# Altium PCB NODE_2_PCB.PcbDoc
Units mm, origin at the board's own origin, x right, y up, seen from the top; angles counter-clockwise.
Board outline 130 x 135 mm, 2 copper layers (Top Layer, Bottom Layer); 55 components, 51 nets, 273 pads, 0 vias.
Unrouted connection lines stored in the file: 153.
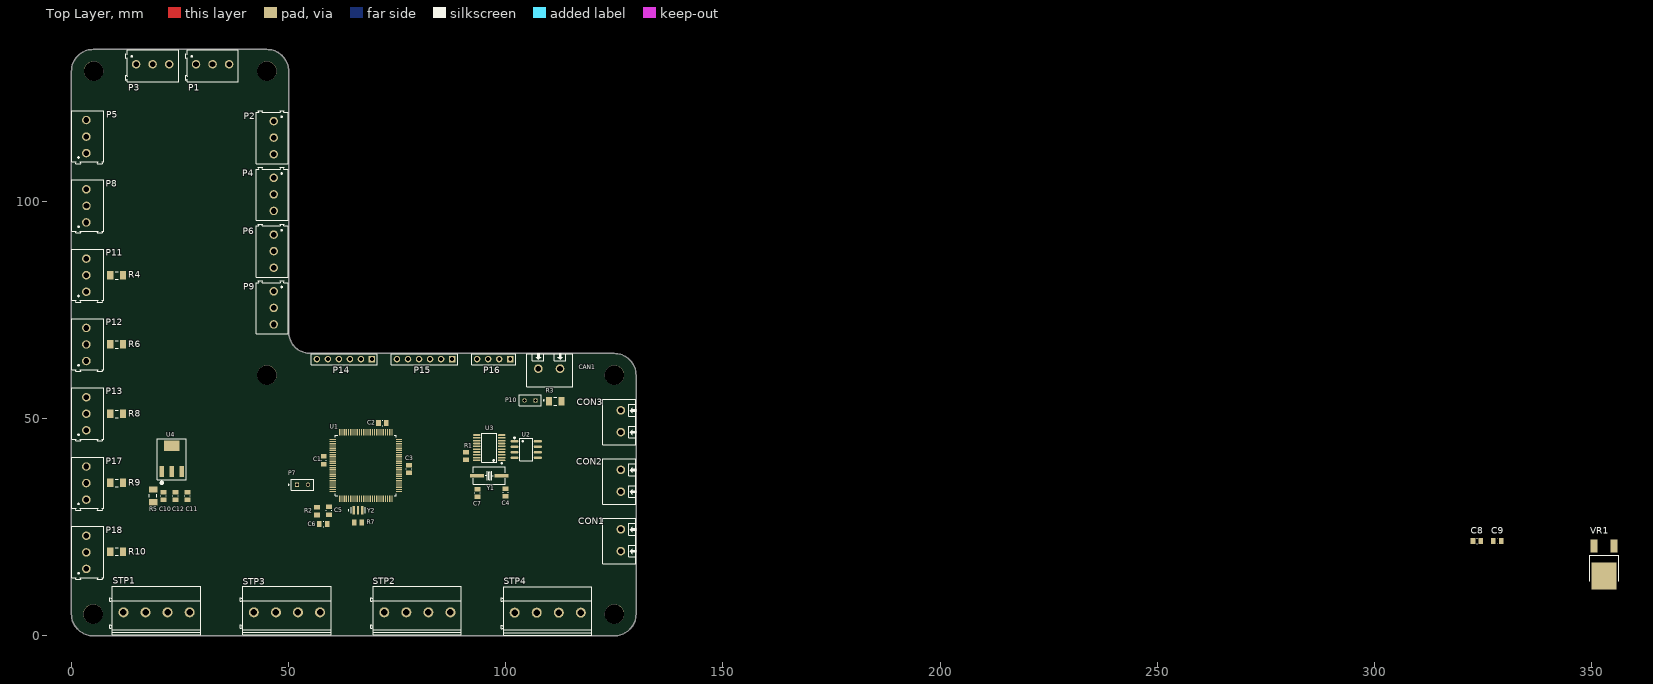
[diagram p0: Top Layer view]
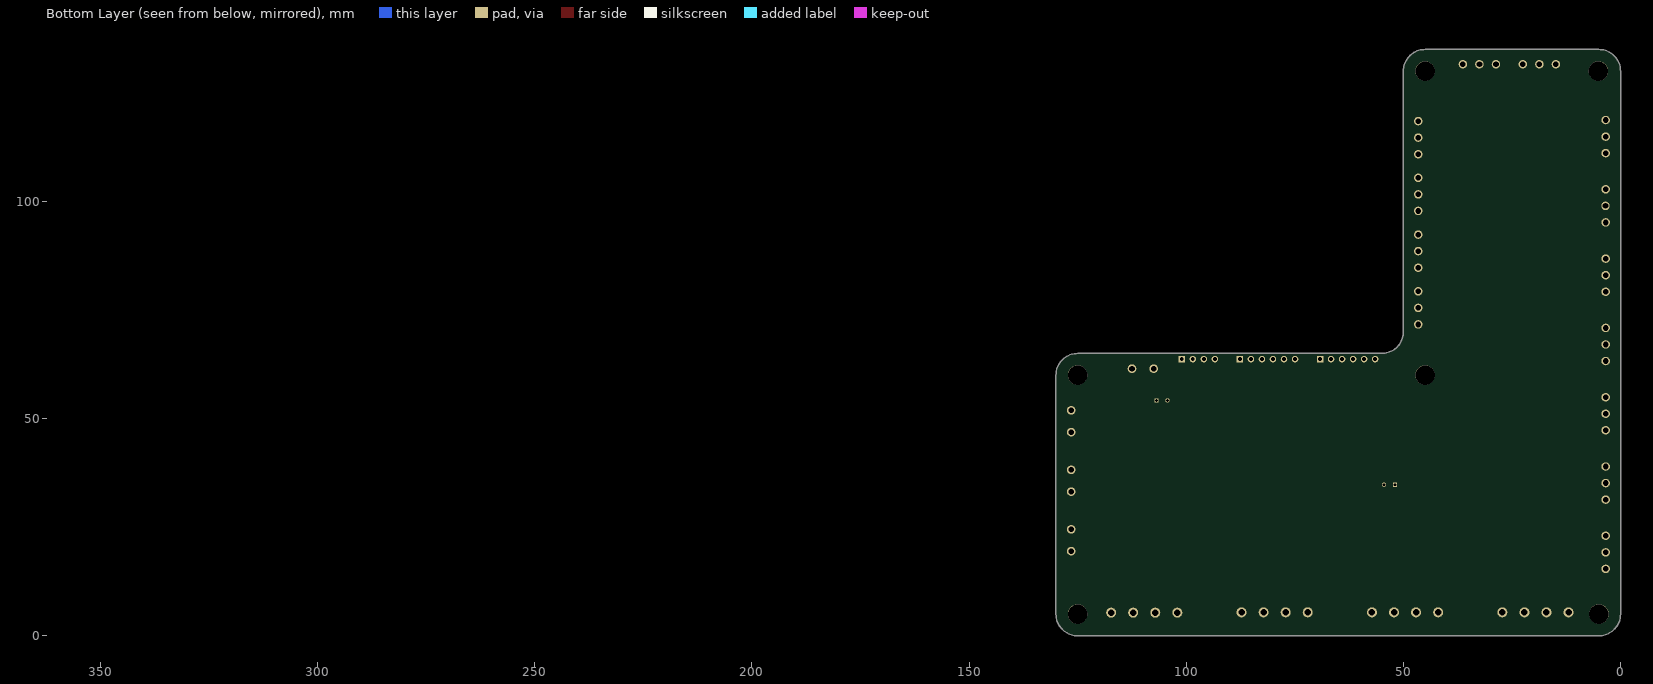
[diagram p1: Bottom Layer view, seen from below]

## Layer stack, top to bottom
Top Solder: solder mask 0.0102, Solder Resist, Dk 3.5
Top Layer: signal copper 0.0356
Dielectric 1: dielectric 0.32, FR-4, Dk 4.8
Bottom Layer: signal copper 0.0356
Bottom Solder: solder mask 0.0102, Solder Resist, Dk 3.5

## Board outline
0.006,5.006 0.006,130.006 cw(c5.006,130.006) 5.006,135.006 45.006,135.006 cw(c45.006,130.006) 50.006,130.006 50.006,70.006 ccw(c55.006,70.006) 55.006,65.006 125.006,65.006 cw(c125.006,60.006) 130.006,60.006 130.006,5.006 cw(c125.006,5.006) 125.006,0.006 5.006,0.006 cw(c5.006,5.006)

## Design rules (kind name [scope] priority, off if disabled: settings)
Clearance [All] p1: gap=0.254 ignorepadtopadclearanceinfootprint=FALSE except(0: Arc-Hole Track-Hole SMDPad-Hole THPad-Hole Via-Hole Fill-Hole Poly-Hole Region-Hole Text-Hole)
PolygonConnect [All] p1: connectstyle=Relief reliefconductorwidth=0.254 reliefentries=4 polygonreliefangle="90 Angle" airgapwidth=0.254
RoutingVias [All] p1: holewidth=0.711 width=1.27 viastyle="Through Hole" minholewidth=0.711 minwidth=1.27 maxholewidth=0.711 maxwidth=1.27
SolderMaskExpansion [All] p1: expansion=0.102 istentingtop=FALSE
Width [All] p1: maxlimit=0.254 minlimit=0.254 preferedwidth=0.254
30 further rules are at their usual default settings.

## Components (designator, comment, footprint, x,y, rotation, side; value= is the part's Value field where it differs from the comment)
C1 "Cap" CAPC2012X135N 58.1,40.4 r270 top value=100nF
C2 "Cap" CAPC2012X135N 71.6,49 r180 top value=100nF
C3 "Cap" CAPC2012X135N 77.7,38.4 r90 top value=100nF
C4 "Cap" CAPC2012X135N 100,33 r90 top value=30pF
C5 "Cap" CAPC2012X135N 59.3,28.8 r270 top value=22pF
C6 "Cap" CAPC2012X135N 58,25.7 r0 top value=100nF
C7 "Cap" CAPC2012X135N 93.5,32.89 r270 top value=30pF
C8 "Cap" CAPC2012X135N 323.599,21.8 r0 top value=10uF
C9 "Cap" CAPC2012X135N 328.299,21.8 r0 top value=10uF
C10 "Cap" CAPC2012X135N 21.243,32.2 r90 top value=100nF
C11 "Cap" CAPC2012X135N 26.7,32.2 r90 top value=10uF
C12 "Cap" CAPC2012X135N 23.972,32.2 r90 top value=100nF
CAN1 "CAN_PORT" 12V_CON 112.5,61.5 r180 top
CON1 "5V_SUPPLY" 12V_CON 126.5,19.5 r90 top
CON2 "12V_PORT" 12V_CON 126.5,33.2 r90 top
CON3 "36VDC" 12V_CON 126.5,46.9 r90 top
P1 "Header 3" 3PIN_H#1 32.5,131.6 r0 top
P2 "Header 3" 3PIN_H#1 46.6,114.7 r270 top
P3 "Header 3" 3PIN_H#1 18.7,131.6 r0 top
P4 "Header 3" 3PIN_H#1 46.6,101.633 r270 top
P5 "Header 3" 3PIN_H#1 3.438,114.941 r90 top
P6 "Header 3" 3PIN_H#1 46.6,88.567 r270 top
P7 "Header 2" SAMTEC_TS-102-G-A 53.2,34.8 r0 top
P8 "Header 3" 3PIN_H#2 3.438,98.986 r90 top
P9 "Header 3" 3PIN_H#1 46.6,75.5 r270 top
P10 "Header 2" SAMTEC_TS-102-G-A 105.6,54.2 r180 top
P11 "Header 3" 3PIN_H#1 3.438,83.031 r90 top
P12 "Header 3" 3PIN_H#1 3.438,67.075 r90 top
P13 "Header 3" 3PIN_H#1 3.438,51.12 r90 top
P14 "Header 6" HDR1X6 69.2,63.7 r180 top
P15 "Header 6" HDR1X6 87.66,63.7 r180 top
P16 "Header 4" HDR1X4 101.04,63.7 r180 top
P17 "Header 3" 3PIN_H#1 3.438,35.165 r90 top
P18 "Header 3" 3PIN_H#1 3.438,19.21 r90 top
R1 "Res2" RESC2013X06N 90.9,41.4 r270 top value=10K
R2 "Res2" RESC2013X06N 56.5,28.7 r270 top value=1K
R3 "Res2" CRCW1206120RFKEAHP 111.4,54 r0 top value=120
R4 "Res2" CRCW1206120RFKEAHP 10.4,83 r0 top value=480K
R5 "Res2" CRCW1206120RFKEAHP 18.8,32.2 r90 top value=480K
R6 "Res2" CRCW1206120RFKEAHP 10.4,67.1 r0 top value=480K
R7 "Res1" RESC2013X06N 66,26.1 r0 top value=1M
R8 "Res2" CRCW1206120RFKEAHP 10.4,51.1 r0 top value=480K
R9 "Res2" CRCW1206120RFKEAHP 10.4,35.2 r0 top value=480K
R10 "Res2" CRCW1206120RFKEAHP 10.4,19.4 r0 top value=480K
STP1 "STPR_MTR_PORT" "CONN-TH_4P-P5.08_DIBO_DB128V-5.08 - duplicate1" 19.6,5.4 r0 top
STP2 "STPR_MTR_PORT" "CONN-TH_4P-P5.08_DIBO_DB128V-5.08 - duplicate1" 79.653,5.4 r0 top
STP3 "STPR_MTR_PORT" "CONN-TH_4P-P5.08_DIBO_DB128V-5.08 - duplicate1" 49.627,5.4 r0 top
STP4 "STPR_MTR_PORT" "CONN-TH_4P-P5.08_DIBO_DB128V-5.08 - duplicate1" 109.68,5.334 r0 top
U1 "ATMEGA2560-16AU" QFP50P1600X1600X120-100N 67.8,39.2 r0 top
U2 "TJA1050DRG" "SOP-8_L4.9-W3.9-P1.27-LS6.0-BL - duplicate" 104.7,42.9 r270 top
U3 "MCP2515T-I/ST" TSSOP-20_L6.5-W4.4-P0.65-LS6.4-BL 96.2,43.3 r90 top
U4 "36-8V" SOT-223-3_L6.5-W3.4-P2.30-LS7.0-BR 23.1,40.8 r270 top
VR1 "5-3.3V" TO-252-2_L6.6-W6.1-P4.57-LS9.9-BR-CW 352.899,17.2 r90 top
Y1 "XTAL" CRYSTAL-SMD_L7.4-W4.0-LS8.0 96.2,36.9 r0 top value=8MHz
Y2 "CSTCE16M0V53-R0" OSC_CSTCE16M0V53-R0 66,28.9 r0 top value=16MHz

## Footprints (in the part's own frame and the unit in brackets; to place one, negate y for a bottom-side part, rotate by r counter-clockwise, add the part's x,y. Pads: shape width x height; smd on the part's side, far side on the other; paste and mask are expansions set on the pad)
3PIN_H#1 [mm]
  round 1.95 hole 1.3: 1(-3.81,0) 2(0,0) 3(3.81,0)
  silkscreen extent -6.21,-4.06 5.97,3.34, body extent -5.84,-4.08 5.99,3.32, height 8.51
3PIN_H#2 [mm]
  round 1.95 hole 1.3: 1(-3.81,0) 2(0,-0.038) 3(3.81,0)
  silkscreen extent -6.21,-4.06 5.97,3.34, body extent -5.84,-4.08 5.99,3.32, height 8.51
12V_CON [mm]
  round 2 hole 1.3 paste-2539.97 mask+0.051: 1(0,0) 2(5,0)
  silkscreen extent -2.88,-3.56 7.62,4.19, body extent -2.96,-3.43 7.54,4.17, height 10
CAPC2012X135N [mm]
  rect 1.05x1.38 smd: 1(-0.89,0) 2(0.89,0)
  silkscreen extent -0.05,-0.63 0.05,0.63, body extent -1,-0.63 1,0.63, height 1.35
"CONN-TH_4P-P5.08_DIBO_DB128V-5.08 - duplicate1" [mm]
  round 2.3 hole 1.5 paste-2539.97 mask+0.05: 1(-7.62,0) 2(-2.54,0) 3(2.54,0) 4(7.62,0)
  silkscreen extent -10.72,-5.2 10.16,5.97, body extent -10.16,-5.33 10.16,5.87, height 18
CRCW1206120RFKEAHP [mm] "Chip Resistor, 2-Leads, Body 3.10x1.60mm, IPC Medium Density"
  rect 1.4x1.95 smd: 1(-1.45,0) 2(1.45,0)
  silkscreen extent -0.35,-0.87 0.35,0.87, body extent -1.65,-0.87 1.65,0.87, height 0.65
CRYSTAL-SMD_L7.4-W4.0-LS8.0 [mm]
  rect 3.2x0.8 smd paste+0 mask+0.05: 1(-2.8,0) 2(2.8,0)
  silkscreen extent -3.7,-2 3.7,2, body extent -3.84,-2.08 3.76,2.02, height 2.23
HDR1X4 [mm] "Connector; Header; 4 Position"
  rect 1.5x1.5 hole 0.9: 1(0,0)
  round 1.5 hole 0.9: 2(2.54,0) 3(5.08,0) 4(7.62,0)
  silkscreen extent -1.27,-1.27 8.89,1.27
HDR1X6 [mm] "Connector; Header; 6 Position"
  rect 1.5x1.5 hole 0.9: 1(0,0)
  round 1.5 hole 0.9: 2(2.54,0) 3(5.08,0) 4(7.62,0) 5(10.16,0) 6(12.7,0)
  silkscreen extent -1.27,-1.27 13.97,1.27
OSC_CSTCE16M0V53-R0 [mm]
  rect 0.6x1.9 smd: 1(-0.95,0) 3(0.95,0)
  rect 0.4x1.9 smd: 2(0,0)
  silkscreen extent -2.3,-0.65 1.6,0.65, body extent -1.6,-0.65 1.6,0.65, height 1
QFP50P1600X1600X120-100N [mil]
  rect 58x11 smd: 1(-300,236) 2(-300,217) 3(-300,197) 4(-300,177) 5(-300,157) 6(-300,138) 7(-300,118) 8(-300,98) 9(-300,79) 10(-300,59) 11(-300,39) 12(-300,20) 13(-300,0) 14(-300,-20) 15(-300,-39) 16(-300,-59) 17(-300,-79) 18(-300,-98) 19(-300,-118) 20(-300,-138) 21(-300,-157) 22(-300,-177) 23(-300,-197) 24(-300,-217) 25(-300,-236) 51(300,-236) 52(300,-217) 53(300,-197) 54(300,-177) 55(300,-157) 56(300,-138) 57(300,-118) 58(300,-98) 59(300,-79) 60(300,-59) 61(300,-39) 62(300,-20) 63(300,0) 64(300,20) 65(300,39) 66(300,59) 67(300,79) 68(300,98) 69(300,118) 70(300,138) 71(300,157) 72(300,177) 73(300,197) 74(300,217) 75(300,236)
  rect 11x58 smd: 26(-236,-300) 27(-217,-300) 28(-197,-300) 29(-177,-300) 30(-157,-300) 31(-138,-300) 32(-118,-300) 33(-98,-300) 34(-79,-300) 35(-59,-300) 36(-39,-300) 37(-20,-300) 38(0,-300) 39(20,-300) 40(39,-300) 41(59,-300) 42(79,-300) 43(98,-300) 44(118,-300) 45(138,-300) 46(157,-300) 47(177,-300) 48(197,-300) 49(217,-300) 50(236,-300) 76(236,300) 77(217,300) 78(197,300) 79(177,300) 80(157,300) 81(138,300) 82(118,300) 83(98,300) 84(79,300) 85(59,300) 86(39,300) 87(20,300) 88(0,300) 89(-20,300) 90(-39,300) 91(-59,300) 92(-79,300) 93(-98,300) 94(-118,300) 95(-138,300) 96(-157,300) 97(-177,300) 98(-197,300) 99(-217,300) 100(-236,300)
  silkscreen extent -276,-276 276,276, body extent -315,-315 315,315, height 47
RESC2013X06N [mm] "Chip Resistor, 2-Leads, Body 2.00x1.27mm, IPC Medium Density"
  rect 1.1x1.4 smd: 1(-0.875,0) 2(0.875,0)
  body extent -1.07,-0.7 1.07,0.7, height 0.65
SAMTEC_TS-102-G-A [mm]
  rect 0.985x0.985 hole 0.635: 1(-1.27,0)
  round 0.985 hole 0.635: 2(1.27,0)
  silkscreen extent -3.29,-1.27 2.54,1.27, body extent -2.64,-1.4 2.64,1.14, height 8.29
"SOP-8_L4.9-W3.9-P1.27-LS6.0-BL - duplicate" [mm]
  oval 0.63x1.865 smd paste+0 mask+0.051: 1(-1.905,-2.682) 2(-0.635,-2.682) 3(0.635,-2.682) 4(1.905,-2.682) 5(1.905,2.682) 6(0.635,2.682) 7(-0.635,2.682) 8(-1.905,2.682)
  silkscreen extent -2.82,-2.83 2.58,1.52
SOT-223-3_L6.5-W3.4-P2.30-LS7.0-BR [mm]
  rect 2.5x1.1 smd paste+0 mask+0.051: 1(2.97,-2.3) 2(2.97,0) 3(2.97,2.3)
  rect 2.34x3.6 smd paste+0 mask+0.051: 4(-2.97,0)
  silkscreen extent -4.57,-3.3 5.84,3.3, body extent -3.88,-3.25 3.12,3.25, height 1.71
TO-252-2_L6.6-W6.1-P4.57-LS9.9-BR-CW [mm]
  rect 3x1.6 smd paste+0 mask+0.051: 1(3.424,-2.29) 3(3.424,2.29)
  rect 6.2x5.8 smd paste+0 mask+0.051: 2(-3.424,0)
  silkscreen extent -4.58,-3.35 1.38,3.35, body extent -6.22,-3.29 3.7,3.29, height 2.29
TSSOP-20_L6.5-W4.4-P0.65-LS6.4-BL [mm]
  oval 0.364x1.742 smd paste+0 mask+0.051: 1(-2.925,-2.871) 2(-2.275,-2.871) 3(-1.625,-2.871) 4(-0.975,-2.871) 5(-0.325,-2.871) 6(0.325,-2.871) 7(0.975,-2.871) 8(1.625,-2.871) 9(2.275,-2.871) 10(2.925,-2.871) 11(2.925,2.871) 12(2.275,2.871) 13(1.625,2.871) 14(0.975,2.871) 15(0.325,2.871) 16(-0.325,2.871) 17(-0.975,2.871) 18(-1.625,2.871) 19(-2.275,2.871) 20(-2.925,2.871)
  silkscreen extent -3.71,-3.02 3.33,1.77, body extent -3.25,-3.3 3.25,3.1, height 1.06

## Part data
C1 C2 C3 C6 C10 C12: "Capacitor", Part Number=TCC0805X7R104M500DT, LatestRevisionDate=17-Jul-2002, LatestRevisionNote="Re-released for DXP Platform.", PackageDescription="Radial Cap, Thru-Hole; 2 Leads; 0.3 in Pin Spacing", PackageReference=RAD-0.3, Published=8-Jun-2000, Publisher="Altium Limited"
  C10 C12: PN=TCC0805X7R104M500DT
C4 C7: "Capacitor", Part Number=TCC0805COG300J500BT, LatestRevisionDate=17-Jul-2002, LatestRevisionNote="Re-released for DXP Platform.", PackageDescription="Radial Cap, Thru-Hole; 2 Leads; 0.3 in Pin Spacing", PackageReference=RAD-0.3, Published=8-Jun-2000, Publisher="Altium Limited"
C5: "Capacitor", Part Number=TCC0805COG220J500BT, LatestRevisionDate=17-Jul-2002, LatestRevisionNote="Re-released for DXP Platform.", PackageDescription="Radial Cap, Thru-Hole; 2 Leads; 0.3 in Pin Spacing", PackageReference=RAD-0.3, Published=8-Jun-2000, Publisher="Altium Limited"
C8 C9 C11: "Capacitor", Part Number=CL21A106KOQNNNE, LatestRevisionDate=17-Jul-2002, LatestRevisionNote="Re-released for DXP Platform.", PackageDescription="Radial Cap, Thru-Hole; 2 Leads; 0.3 in Pin Spacing", PackageReference=RAD-0.3, Published=8-Jun-2000, Publisher="Altium Limited"
CAN1: library part 2PIN_CON_1, Part Number=MX126-5.0-02P-GN01-Cu-S-A
CON1 CON2: library part 2PIN_CON, Part Number=MX126-5.0-02P-GN01-Cu-S-A
CON3: library part 2PIN_CON_2, Part Number=MX126-5.0-02P-GN01-Cu-S-A
P1 P2 P3 P4 P5 P6 P8 P9 P11 P12 P13 P17 P18: "Header, 3-Pin", Part Number=DB125-3.81-3P-BK-S, LatestRevisionDate=17-Jul-2002, LatestRevisionNote="Re-released for DXP Platform.", Publisher="Altium Limited"
P7 P10: "Header, 2-Pin", Part Number=PH-01078, LatestRevisionDate=17-Jul-2002, LatestRevisionNote="Re-released for DXP Platform.", Publisher="Altium Limited"
P14 P15: "Header, 6-Pin", Part Number=P125-1106A0BS116A1, LatestRevisionDate=17-Jul-2002, LatestRevisionNote="Re-released for DXP Platform.", Publisher="Altium Limited"
P16: "Header, 4-Pin", Part Number=HB-PH3-25414PB2GOP, LatestRevisionDate=17-Jul-2002, LatestRevisionNote="Re-released for DXP Platform.", Publisher="Altium Limited"
R1: "Resistor", Part Number=RC0805JR-0710KL, LatestRevisionDate=17-Jul-2002, LatestRevisionNote="Re-released for DXP Platform.", PackageDescription="Axial Device, Thru-Hole; 2 Leads; 0.4 in Pin Spacing", PackageReference=AXIAL-0.4, Published=8-Jun-2000, Publisher="Altium Limited"
R2 R7: "Resistor", Part Number=RC0805JR-071KL, LatestRevisionDate=17-Jul-2002, LatestRevisionNote="Re-released for DXP Platform.", Published=8-Jun-2000, Publisher="Altium Limited"
  R2: PackageDescription="Axial Device, Thru-Hole; 2 Leads; 0.4 in Pin Spacing", PackageReference=AXIAL-0.4
  R7: PackageDescription="Axial Device, Thru-Hole; 2 Leads; 0.3 in Pin Spacing", PackageReference=AXIAL-0.3
R3: "Resistor", Part Number=CRCW1206120RFKEAHP, LatestRevisionDate=17-Jul-2002, LatestRevisionNote="Re-released for DXP Platform.", PackageDescription="Axial Device, Thru-Hole; 2 Leads; 0.4 in Pin Spacing", PackageReference=AXIAL-0.4, Published=8-Jun-2000, Publisher="Altium Limited"
R4 R5 R6 R8 R9 R10: "Resistor", Part Number=1206W4J0484T5E, LatestRevisionDate=17-Jul-2002, LatestRevisionNote="Re-released for DXP Platform.", PackageDescription="Axial Device, Thru-Hole; 2 Leads; 0.4 in Pin Spacing", PackageReference=AXIAL-0.4, Published=8-Jun-2000, Publisher="Altium Limited"
STP1 STP2 STP3 STP4: "OUTPUT TO SUPPLY THE STEPPER MOTOR NEEDS", Part Number=WJ500V-5.08-2P
U1: "AVR AVRÂ® ATmega Microcontroller IC 8-Bit 16MHz 256KB (128K x 16) FLASH 100-TQFP (14x14)", Package="TQFP-100 Microchip", Availability="In Stock", Check_prices=https://www.snapeda.com/parts/ATMEGA2560-16AU/Microchip/view-part/?ref=eda, MF=Microchip, Part Number=ATMEGA2560-16AU, Price=None, Purchase-URL=https://pricing.snapeda.com/search?q=ATMEGA2560-16AU&ref=eda, SnapEDA_Link=https://www.snapeda.com/parts/ATMEGA2560-16AU/Microchip/view-part/?ref=snap
U2: JLCPCB Part Class="Extended Part", Manufacturer=HGC(深圳汉芯), Add into BOM=yes, Convert to PCB=yes, Datasheet=https://atta.szlcsc.com/upload/public/pdf/source/20231229/9EC40A6172CAB0350BF7AF3421F4DEBF.pdf, Device=TJA1050DRG, LCSC Part Name=TJA1050DRG, Part Number=TJA1050DRG, Supplier=LCSC, Supplier Footprint=SOP-8, Supplier Part=C19723770, Symbol=TJA1050DRG
U3: JLCPCB Part Class="Extended Part", LCSC Part Name=2.7V~5.5V, Manufacturer=MICROCHIP(美国微芯), Operating Temperature=-40℃~+85℃, Supply Current=10mA, Add into BOM=yes, Convert to PCB=yes, Datasheet=https://atta.szlcsc.com/upload/public/pdf/source/20180521/C185941_CF4E8B602AE128DB1B8E6B0AB1F829A7.pdf, Device=MCP2515T-I/ST, Part Number=MCP2515T-I/ST, Supplier=LCSC, Supplier Footprint=TSSOP-20, Supplier Part=C185941, Supply Voltage=2.7V~5.5V, Symbol=MCP2515T-I/ST
U4: library part LT3088MPST#PBF, "LDO Regulator Pos 0V to 34.5V 0.8A Automotive 4-Pin(3+Tab) SOT-223 Tube", Manufacturer="Analog Devices / Linear Technology", Supplier Part Number=584-LT3088MPST#PBF, Category="Voltage Regulators - Linear", ComponentLink1Description=http://www.linear.com/docs/46566?src-supplier=Digikey, ComponentLink1URL=http://www.linear.com/docs/46566?src-supplier=Digikey, Part Number=LT3088MPST#PBF, Pricing="1=13.29, 10=12.21, 50=11.71, 100=10.32, 1000=9.18, 10000=9.18 (USD)", RoHS=Yes, Stock=477, Supplier=Mouser
VR1: library part "Volt Reg", "Voltage Regulator", Part Number=AP7363-33D-13, LatestRevisionDate=29-May-2009, LatestRevisionNote="IPC-7351 Footprint Added.", PackageDescription="3-Pin Transistor Outline Package 2.54 mm Pitch, 15.1 mm Lead Span", PackageReference=D2PAK, Published=24-Mar-1999, Publisher="Altium Limited"
Y1: "Crystal Oscillator", Part Number=S47SMD8.000M12PF20R30B3, LatestRevisionDate=17-Jul-2002, LatestRevisionNote="Re-released for DXP Platform.", PackageDescription="Crystal, Thru-Hole; 2 Leads; Body 3.1 x 8.2 mm (Dia.xH)", PackageReference=R38, Published=8-Jun-2000, Publisher="Altium Limited"
Y2: "16 MHz Ceramic Resonator Built in Capacitor 15 pF Â±0.3% -20Â°C ~ 80Â°C Surface Mount", Package="SMD-3 Murata", Availability="In Stock", Check_prices=https://www.snapeda.com/parts/CSTCE16M0V53-R0/Murata+Electronics+North+America/view-part/?ref=eda, MF=Murata, Part Number=CSTCE16M0V53-R0, Price=None, Purchase-URL=https://pricing.snapeda.com/search/part/CSTCE16M0V53-R0/?ref=eda, SnapEDA_Link=https://www.snapeda.com/parts/CSTCE16M0V53-R0/Murata+Electronics+North+America/view-part/?ref=snap

## Free pads (board coordinates)
  round 4.5 hole 4.5 unplated: 0(5.006,5.006) 0(5.1,130) 0(45.006,60.006) 0(45.006,130.006) 0(125.006,5.006) 0(125.006,60.006)

## Nets (pads, with @x,y where several pads share a name; then routed paths per layer and width w, separated by ;. In a path a pad name is that pad's centre, name@x,y a point inside that pad or via, vN(x,y) a via of type N, cw(c..) or ccw(c..) an arc to the next point about the centre after c; other vN are vias at no path point)
3V3: C9.2 VR1.3
5V: C1.1 C2.1 C3.1 C6.1 C8.2 CON1.1 P1.1 P2.1 P3.1 P4.1 P5.1 P6.1 P8.1 P9.1 P14.1 P15.1 P16.1 R1.2 R2.2 R4.2 R6.2 R8.2 R9.2 R10.2 U1.10 U1.31 U1.61 U1.80 U1.98 U1.100 U2.3 U3.20 VR1.1
12V: CON2.1 STP1.1 STP3.1
24V: C11.2 P11.1 P12.1 P13.1 P17.1 P18.1 STP2.1 STP4.1 U4.3 U4.4
36V: C10.2 CON3.1 U4.2
CAN_ENABLE: U1.19 U3.18
CAN_INT: U1.45 U3.13
DIR1_12V: STP1.3 U1.53
DIR1_24V: STP2.3 U1.55
DIR2_12V: STP3.3 U1.54
DIR2_24V: STP4.3 U1.56
GND: C1.2 C2.2 C3.2 C4.1 C5.2 C6.2 C7.2 C8.1 C9.1 C10.1 C11.1 C12.1 CON1.2 CON2.2 CON3.2 P1.3 P2.3 P3.3 P4.3 P5.3 P6.3 P8.3 P9.3 P11.3 P12.3 P13.3 P14.2 P15.2 P16.4 P17.3 P18.3 R5.1 STP1.4 STP2.4 STP3.4 STP4.4 U1.11 U1.32 U1.62 U1.81 U1.99 U2.2 U2.8 U3.10 VR1.2 Y2.2
LMT_1: P11.2 R4.1 U1.78
LMT_2: P12.2 R6.1 U1.77
LMT_3: P13.2 R8.1 U1.76
LMT_4: P17.2 R9.1 U1.75
LMT_5: P18.2 R10.1 U1.74
MISO: P7.2 P14.4 U1.22
MOSI: P14.3 U1.21 U3.16
NetC4_2: C4.2 U3.9 Y1.2
NetC7_1: C7.1 U3.8 Y1.1
NetC12_2: C12.2 R5.2 U4.1
NetCAN1_1: CAN1.1 R3.2 U2.7
NetCAN1_2: CAN1.2 P10.2 U2.6
NetP7_1: P7.1 U3.17
NetP10_1: P10.1 R3.1
NetR1_1: R1.1 U3.19
NetU2_1: U2.1 U3.1
nRESET: C5.1 P14.6 R2.1 U1.30
RX: P16.2 U1.2
RXCAN: U2.4 U3.2
SCK: P14.5 U1.20 U3.14
SERVO_1: P2.2 U1.1
SERVO_2: P4.2 U1.5
SERVO_3: P6.2 U1.15
SERVO_4: P9.2 U1.16
SERVO_5: P1.2 U1.17
SERVO_6: P3.2 U1.18
SERVO_7: P5.2 U1.23
SERVO_8: P8.2 U1.24
STP1_12V: STP1.2 U1.73
STP1_24V: STP2.2 U1.71
STP2_12V: STP3.2 U1.72
STP2_24V: STP4.2 U1.25
TCK: P15.6 U1.93
TDI: P15.3 U1.90
TDO: P15.4 U1.91
TMS: P15.5 U1.92
TX: P16.3 U1.3
XTAL1: R7.1 U1.34 Y2.1
XTAL2: R7.2 U1.33 Y2.3
pads on no net: U1.4 U1.6 U1.7 U1.8 U1.9 U1.12 U1.13 U1.14 U1.26 U1.27 U1.28 U1.29 U1.35 U1.36 U1.37 U1.38 U1.39 U1.40 U1.41 U1.42 U1.43 U1.44 U1.46 U1.47 U1.48 U1.49 U1.50 U1.51 U1.52 U1.57 U1.58 U1.59 U1.60 U1.63 U1.64 U1.65 U1.66 U1.67 U1.68 U1.69 U1.70 U1.79 U1.82 U1.83 U1.84 U1.85 U1.86 U1.87 U1.88 U1.89 U1.94 U1.95 U1.96 U1.97 U2.5 U3.3 U3.4 U3.5 U3.6 U3.7 U3.11 U3.12 U3.15

## Silkscreen, mask and mechanical layers (free items; w line width, h text height)
Mechanical 1:
  circle w0.013: c5.006,5.006 r2.25
  circle w0.013: c125.006,5.006 r2.25
  circle w0.013: c125.006,60.006 r2.25
  circle w0.013: c45.006,60.006 r2.25
  circle w0.013: c5.006,130.006 r2.25